# EAGLE board aprs_tracker_v5 (EAGLE 9.6.2)
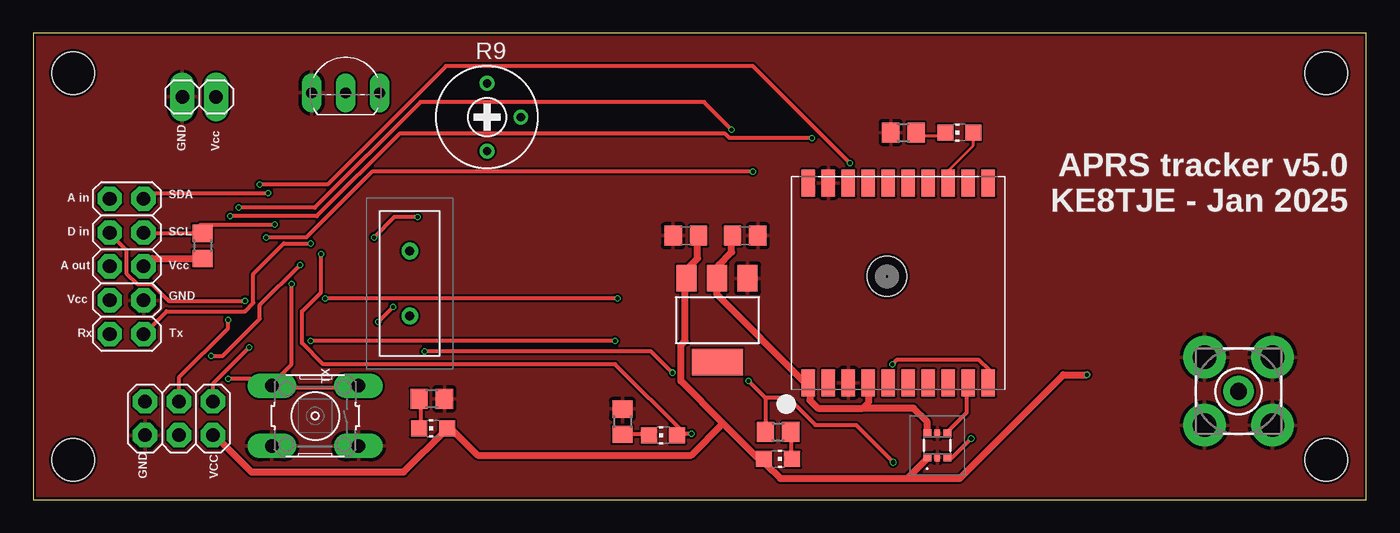
[diagram p0: board, top side]
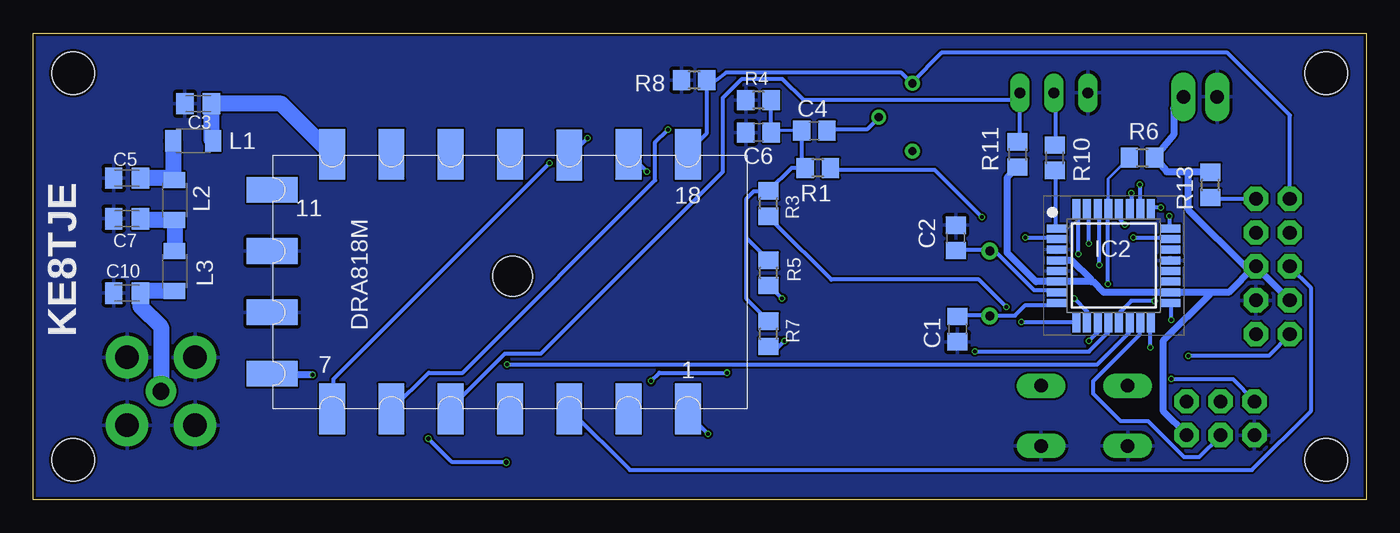
[diagram p1: board, bottom side, seen from below]

Size 100 x 35 mm. Coordinates in mm from the lower left corner, seen from the top.
Outline: 0,0 100,0 100,35 0,35 0,0
Copper layers (1*16): Top 0.035mm / dielectric 1.6mm / Bottom 0.035mm
Design rules "jlcpcb-2layers": minimum track width 5mil, minimum drill 0.3mm, track to track 5mil, track to pad 5mil, pad to pad 5mil, via to via 5mil, smd to smd 5mil, copper to edge 0.2mm, drill to drill 6mil, minimum pad ring 10mil, minimum via ring 3mil, stop-mask expansion 4mil, vias tented up to drill 0mil, thermal gap 10mil
Net classes: 0 default: width 0.229 mm, clearance 0.152 mm; 1 PWR: width 0.508 mm, clearance 0.152 mm; 2 V_bat: width 0.305 mm, clearance 0.152 mm; 3 50 ohm: width 1.21 mm, clearance 0.26 mm
Holes 3.2 mm at 3,32 3,3 97,32 97,3

## Footprints (pad centres in the part's own frame; a part is rotated, then mirrored left to right if it is on the bottom)
C0805 = smd 1.3 x 1.5: 1 -0.95,0; 2 0.95,0
C0805K = smd 1.3 x 1.6: 1 -1,0; 2 1,0
CHIP-LED0805 = smd 1.2 x 1.2: A 0,-1.05; C 0,1.05
QFP80P900X900X120-32N = smd 1.5 x 0.6: 1 -4.25,2.8; 2 -4.25,2; 3 -4.25,1.2; 4 -4.25,0.4; 5 -4.25,-0.4; 6 -4.25,-1.2; 7 -4.25,-2; 8 -4.25,-2.8; 17 4.25,-2.8; 18 4.25,-2; 19 4.25,-1.2; 20 4.25,-0.4; 21 4.25,0.4; 22 4.25,1.2; 23 4.25,2; 24 4.25,2.8 | smd 0.6 x 1.5: 9 -2.8,-4.25; 10 -2,-4.25; 11 -1.2,-4.25; 12 -0.4,-4.25; 13 0.4,-4.25; 14 1.2,-4.25; 15 2,-4.25; 16 2.8,-4.25; 25 2.8,4.25; 26 2,4.25; 27 1.2,4.25; 28 0.4,4.25; 29 -0.4,4.25; 30 -1.2,4.25; 31 -2,4.25; 32 -2.8,4.25
74LVCH1T45GW125 = smd 0.6 x 0.6: 1 -0.9,0.75; 3 -0.9,-0.75; 4 0.9,-0.75; 6 0.9,0.75 | smd 0.6 x 0.4: 2 -0.9,0; 5 0.9,0
SOT223 = smd 1.499 x 2.007: 1 -2.261,-3.15; 2 0.025,-3.15; 3 2.311,-3.15 | smd 3.81 x 2.007: 4 0,3.15
2X03 = drill 1.016 octagon: 1 -2.54,-1.27; 2 -2.54,1.27; 3 0,-1.27; 4 0,1.27; 5 2.54,-1.27; 6 2.54,1.27
2X05 = drill 1.016 octagon: 1 -5.08,-1.27; 2 -5.08,1.27; 3 -2.54,-1.27; 4 -2.54,1.27; 5 0,-1.27; 6 0,1.27; 7 2.54,-1.27; 8 2.54,1.27; 9 5.08,-1.27; 10 5.08,1.27
L3216C = smd 1.2 x 1.6: 1 -1.5,0; 2 1.5,0
1X02 = drill 1.016 long: 1 -1.27,0; 2 1.27,0
R0805 = smd 1.3 x 1.5: 1 -0.95,0; 2 0.95,0
RTRIM3339P = drill 0.61: 1 -2.54,0; 2 0,-2.54; 3 2.54,0
B3F-10XX = drill 1.016 long: 1 -3.251,2.261; 2 3.251,2.261; 3 -3.251,-2.261; 4 3.251,-2.261
TO92-EBC-OVAL = drill 0.813 long: B 0,-1.27; C 2.54,-1.27; E -2.54,-1.27
FGPMMOPA6H = smd 2 x 1: P$1 -7.5,6.75; P$2 -7.5,5.25; P$3 -7.5,3.75; P$4 -7.5,2.25; P$5 -7.5,0.75; P$6 -7.5,-0.75; P$7 -7.5,-2.25; P$8 -7.5,-3.75; P$9 -7.5,-5.25; P$10 -7.5,-6.75; P$11 7.5,-6.75; P$12 7.5,-5.25; P$13 7.5,-3.75; P$14 7.5,-2.25; P$15 7.5,-0.75; P$16 7.5,0.75; P$17 7.5,2.25; P$18 7.5,3.75; P$19 7.5,5.25; P$20 7.5,6.75 | hole 3: 0.5,0.85
DRA818A = smd 3.81 x 1.93: 1 -9.45,-13.25; 2 -9.45,-8.8; 3 -9.45,-4.35; 4 -9.45,0.1; 5 -9.45,4.55; 6 -9.45,9; 7 -9.45,13.45; 12 9.65,13.45; 13 9.65,9; 14 9.65,4.55; 15 9.65,0.1; 16 9.6,-4.35; 17 9.65,-8.8; 18 9.65,-13.25 | smd 1.93 x 3.81: 8 -6.8,17.95; 9 -2.2,17.95; 10 2.4,17.95; 11 7,17.95
BU-SMA-V = drill 1.27: 1 0,0 | drill 1.778: 2 -2.55,2.55; 3 2.55,2.55; 4 2.55,-2.55; 5 -2.55,-2.55
ATS080BE = drill 0.68 pad 1.247: 1 0,0; 2 4.88,0

## Placement (x,y rotation side)
C1  [C0805]  30.66,12.79 270 bottom
C2  [C0805]  30.8,19.64 90 bottom
C3  20p  [C0805K]  87.63,29.72 180 bottom
C4  4.7u  [C0805]  41.4,27.69 180 bottom
C5  36p  [C0805K]  92.96,24.13 180 bottom
C6  100n  [C0805]  45.59,27.56 180 bottom
C7  36p  [C0805K]  92.96,21.08 180 bottom
C8  10u  [C0805]  48.96,19.81 180 top
C9  10u  [C0805]  53.41,19.81 0 top
C10  20p  [C0805K]  92.96,15.49 180 bottom
D2  [CHIP-LED0805]  55.88,3.05 270 top
D3  [CHIP-LED0805]  69.47,27.56 90 top
D4  [CHIP-LED0805]  47.24,4.83 90 top
D5  [CHIP-LED0805]  29.99,5.33 90 top
IC2  ATMEGA328PB-AUR  [QFP80P900X900X120-32N]  18.94,17.56 0 bottom
IC3  74LVCH1T45GW,125  [74LVCH1T45GW125]  67.82,4.06 90 top
IC4  REG1117  [SOT223]  51.32,13.46 180 top
JP1  [2X03]  10.92,6.1 0 top
JP3  [2X05]  7,17.5 270 top
L1  56n  [L3216C]  88.01,26.92 180 bottom
L2  68n  [L3216C]  89.41,22.48 270 bottom
L3  56n  [L3216C]  89.41,17.14 270 bottom
PWR_IN  PINHD-1X2  [1X02]  12.45,30.23 0 top
R1  8.2k  [R0805]  41.15,24.89 180 bottom
R2  330  [R0805]  29.89,7.57 180 top
R3  3.9k  [R0805]  44.83,22.23 90 bottom
R4  270  [R0805]  45.59,29.97 180 bottom
R5  2.2k  [R0805]  44.83,17.02 90 bottom
R6  10k  [R0805]  16.82,25.66 0 bottom
R7  1k  [R0805]  44.83,12.45 90 bottom
R8  1k  [R0805]  50.42,31.5 180 bottom
R9  1k  [RTRIM3339P]  34.04,28.7 90 top
R10  1k  [R0805]  23.37,25.65 90 bottom
R11  1k  [R0805]  26.16,25.91 270 bottom
R12  330  [R0805]  65.28,27.56 0 top
R13  10k  [R0805]  11.68,23.62 90 bottom
R14  330  [R0805]  44.2,5.84 270 top
R16  10k  [R0805]  12.7,19.05 270 top
R17  1k  [R0805]  55.88,5.08 0 top
S2  [B3F-10XX]  21.15,6.27 180 top
T1  2N2222  [TO92-EBC-OVAL]  23.43,31.8 0 top
U1  [FGPMMOPA6H]  64.9,16.26 90 top
U$1  [DRA818A]  64.14,16.26 90 bottom
X1  BU-SMA-V  [BU-SMA-V]  90.42,8.13 0 top
Y1  ATS080B-E  [ATS080BE]  28.24,13.78 90 top

## Library data of the parts
C1-C10 = rcl; SPICEPREFIX: C
D2-D5 = led
IC2 = ATMEGA328PB-AUR; DESCRIPTION: 8-bit Microcontrollers - MCU ATMEGA328PB IND TEMP T&R; HEIGHT: 1.2mm; MANUFACTURER_NAME: Microchip; MANUFACTURER_PART_NUMBER: ATMEGA328PB-AUR; MOUSER_PART_NUMBER: 556-ATMEGA328PB-AUR; MOUSER_PRICE-STOCK: https://www.mouser.co.uk/ProductDetail/Microchip-Technology/ATMEGA328PB-AUR?qs=jy4bLUHv09i4S8%252BfUeCffg%3D%3D
IC3 = 74LVCH1T45GW_125; DESCRIPTION: 74LVC1T45; 74LVCH1T45 - Dual supply translating transceiver; 3-state@en-us; HEIGHT: 1.1mm; MANUFACTURER_NAME: Nexperia; MANUFACTURER_PART_NUMBER: 74LVCH1T45GW,125; MOUSER_PART_NUMBER: 771-74LVCH1T45GW125; MOUSER_PRICE-STOCK: https://www.mouser.co.uk/ProductDetail/Nexperia/74LVCH1T45GW125?qs=jquClx72t9DcZPG2mG4TEQ%3D%3D
IC4 = burr-brown; MPN: REG1117; OC_FARNELL: 1097566; OC_NEWARK: 14P6981
JP1 JP3 = pinhead
L1-L3 = rcl; SPICEPREFIX: L
PWR_IN = Connector; CATEGORY: Headers; DESCRIPTION: Header, Straight, 2 Position; MANUFACTURER: Generic; MPN: Generic; OPERATING_TEMPERATURE: Generic; PART_STATUS: Active; PITCH: 0.100" (2.54mm); ROHS_COMPLIANCE: Generic; SERIES: Generic; SUB-CATEGORY: Headers, Male Pins; TYPE: Board to Board or Cable, Unshrouded, Through Hole, Straight
R1-R8 R10-R14 R16 R17 = rcl; SPICEPREFIX: R
R9 = rcl; SPICEMODEL: X; SPICEPREFIXL: POT
S2 = switch-omron; MPN: B3F-1000; OC_FARNELL: 176432; OC_NEWARK: 36M3542
T1 U1 = adafruit
U$1 = dorji
X1 = con-coax; OC_FARNELL: unknown; OC_NEWARK: unknown
Y1 = ATS080B-E; DESCRIPTION: Crystals 8MHz 18pF Fund. -40C +85C; HEIGHT: 3.68mm; MANUFACTURER_NAME: CTS; MANUFACTURER_PART_NUMBER: ATS080B-E; MOUSER_PART_NUMBER: 774-ATS080B-E; MOUSER_PRICE-STOCK: https://www.mouser.co.uk/ProductDetail/CTS-Electronic-Components/ATS080B-E?qs=EyvxYzk7Sd1vYvYpN4HpEw%3D%3D

## Nets
+3V3 [PWR]: C9.1 IC3.6 IC4.2 U1.P$1 U1.P$4
A6: IC2.19
A7: IC2.22
GND [V_bat]: C1.2 C2.2 C3.2 C5.2 C6.2 C7.2 C8.2 C9.2 C10.2 IC2.3 IC2.5 IC2.21 IC3.2 IC3.5 IC4.1 JP1.1 JP3.8 PWR_IN.1 R2.1 R4.2 R8.2 R12.1 R14.1 S2.1 S2.2 T1.E U1.P$3 U1.P$19 U$1.9 U$1.10 X1.2 X1.3 X1.4 X1.5
GPS_RX: IC2.12 IC3.3 R17.1
GPS_TX: IC2.14 U1.P$10
MC_APRS_OUT: JP3.1 R8.1 R9.3 U$1.18
MU_RX_1: IC2.23 U$1.17
MU_TX_1: IC2.24 U$1.16
N$1: IC3.4 U1.P$9
N$2 [50 ohm]: C5.1 L1.2 L2.1
N$4 [50 ohm]: C7.1 L2.2 L3.1
N$5: D5.C R2.2
N$6: C1.1 IC2.8 Y1.1
N$7: C2.1 IC2.7 Y1.2
N$8 [50 ohm]: C10.1 L3.2 X1.1
N$9: D2.C R17.2
N$10: C4.2 C6.1 R1.2 R3.2 R4.1 R5.2 R7.2
N$11: C4.1 R9.2
N$12: R11.1 T1.C U$1.5
N$14: R10.2 T1.B
N$20: D3.C R12.2
N$22: D4.C R14.2
N$23: D3.A U1.P$13
PIN4: IC2.2 R1.1
PIN5: IC2.9 R3.1
PIN6: IC2.10 R5.1
PIN7: IC2.11 R7.1
PIN9: IC2.13 JP3.3
PIN11: IC2.15 JP1.3
PIN12: IC2.16 JP1.6
RADIO_OUTPUT_POWER: IC2.26 U$1.7
RADIO_PTT: IC2.1 R10.1
RADIO_SQL: D4.A IC2.32 U$1.1
RADIO_WAKE: IC2.25 U$1.6
RESET: IC2.29 JP1.2 R6.1 S2.3 S2.4
RFOUT [50 ohm]: C3.1 L1.1 U$1.12
RX: IC2.30 JP3.9
SCK: IC2.17 JP1.4
SCL: IC2.28 JP3.4 R16.1
SDA: IC2.27 JP3.2 R13.1
TO_DTMF: JP3.5 U$1.3
TX: IC2.31 JP3.10
VCC [PWR]: C8.1 D2.A D5.A IC2.4 IC2.6 IC2.18 IC3.1 IC4.3 JP1.5 JP3.6 JP3.7 PWR_IN.2 R6.2 R11.2 R13.2 R16.2 U$1.8

## Tracks (layer width: path | path; a pad name or v marks a point on that pad's centre or on a via)
+3V3
  Top 0.508: C9.1 52.39,19.68 52.39,18.57 51.44,17.62 51.44,16.67 IC4.2 51.28,16.35 51.28,15.4 57.94,8.73 U1.P$1 58.26,8.73 58.26,7.46 58.86,6.86 62.23,6.86 | 62.71,8.73 U1.P$4 62.65,7.28 62.23,6.86 | 62.23,6.86 66.04,6.86 67.07,5.83 IC3.6
GND
  pour Bottom: -1.52,36.32 101.09,36.32 101.09,-1.78 -1.52,-1.78
  pour Top: -1.52,36.58 100.33,36.58 100.33,-2.29 -1.52,-2.29
GPS_RX  (via drill 0.3, 0.35)
  Top 0.305: 55.09,5.08 R17.1 54.93,7.62 | v29.37,11.11 46.35,11.11 v47.94,9.53 | v53.66,8.89 54.93,7.62 | 54.93,7.62 56.65,7.62 58.67,5.59 61.72,5.59 v64.52,2.79 | IC3.3 68.95,3.16 v70.36,4.57
  Bottom 0.305: v29.37,11.11 20.8,11.11 19.37,12.54 19.37,13.18 IC2.12 | v47.94,9.53 53.02,9.53 v53.66,8.89 | v64.52,2.79 68.58,2.79 v70.36,4.57
GPS_TX  (via drill 0.3)
  Top 0.305: v64.45,10.16 64.77,10.48 70.96,10.48 71.75,9.68 71.75,8.89 U1.P$10
  Bottom 0.305: v64.45,10.16 20.16,10.16 17.78,12.54 17.78,13.18 IC2.14
MC_APRS_OUT
  Bottom 0.305: U$1.18 50.96,26.04 49.47,27.52 R8.1 48.79,31.5 48.01,32.07 34.92,32.07 34.13,31.27 | 34.13,31.27 R9.3 | JP3.1 5.73,28.84 10.41,33.53 31.88,33.53 34.13,31.27
MU_RX_1  (via drill 0.3)
  Top 0.305: v17.46,19.68 20.48,19.68 25.4,24.61 v53.98,24.61
  Bottom 0.305: v17.46,19.68 14.76,19.68 IC2.23 | v53.98,24.61 55.24,25.88 U$1.17
MU_TX_1  (via drill 0.3)
  Top 0.305: v14.76,21.27 21.27,21.27 27.46,27.46 51.91,27.46 52.23,27.15 v58.42,27.15
  Bottom 0.305: v14.76,21.27 14.76,20.48 IC2.24 | v58.42,27.15 59.69,25.88 U$1.16
N$1
  Top 0.305: IC3.4 68.58,5.08 70.01,6.51 70.01,8.73 U1.P$9
N$2
  Bottom 1.21: L1.2 89.51,24.08 L2.1 89.56,24.13 C5.1
N$4
  Bottom 1.21: L3.1 L2.2 91.86,20.98 C7.1
N$5
  Top 0.305: D5.C 29.05,5.4 29.05,7.46 R2.2
N$6
  Bottom 0.305: IC2.8 23.34,14.61 25.56,14.61 26.35,13.81 28.1,13.81 Y1.1 28.26,13.81 30.64,13.81 C1.1
N$7
  Bottom 0.305: IC2.7 23.34,15.72 24.92,15.72 27.78,18.57 28.1,18.57 Y1.2 28.26,18.73 30.64,18.73 C2.1
N$8
  Bottom 1.21: L3.2 91.82,15.64 C10.1 91.96,14.49 90.42,12.95 X1.1
N$9
  Top 0.305: D2.C 56.83,3.17 R17.2
N$10
  Bottom 0.229: 44.93,23.08 44.86,23.15 | C4.2 44.52,27.69 C6.1
  Bottom 0.305: C6.1 R4.1 | C4.2 42.35,25.15 R1.2 43.12,24.89 44.86,23.15 | 44.86,23.15 44.93,23.08 | R7.2 46.48,15.05 46.48,19.62 | 46.48,19.62 46.48,22.61 45.94,23.15 44.93,23.15 | 44.93,23.15 44.86,23.15 | R5.2 46.48,19.62 | R3.2 44.93,23.18 44.93,23.15
N$11
  Bottom 0.305: C4.1 40.42,27.78 37.47,27.78 36.67,28.57 R9.2
N$12
  Bottom 0.305: 26.04,30 26.04,30.48 T1.C 26.04,30 | 26.04,30 26.04,26.99 R11.1 | 26.04,30 42.23,30 43.81,31.59 46.83,31.59 48.26,30.16 48.26,24.61 61.91,10.95 64.61,10.95 68.74,6.83 U$1.5
N$14
  Bottom 0.305: R10.2 23.34,26.67 23.34,30.48 T1.B
N$20
  Top 0.229: 66.36,27.3 68.17,27.3 D3.C
  Top 0.305: R12.2 66.23,27.43 66.36,27.3
N$22
  Top 0.305: D4.C 46.04,4.92 44.29,4.92 R14.2
N$23
  Top 0.229: D3.A 70.52,26.58 68.65,24.7 U1.P$13
PIN4  (via drill 0.3)
  Top 0.305: v28.83,21.21 27.08,21.21 v25.56,19.68
  Bottom 0.305: v25.56,19.68 23.34,19.68 IC2.2 | v28.83,21.21 32.38,24.77 40.16,24.77 R1.1
PIN5  (via drill 0.3)
  Top 0.305: v26.99,14.45 v25.88,13.34
  Bottom 0.305: v25.88,13.34 21.75,13.34 IC2.9 | v26.99,14.45 28.37,15.83 28.62,16.08 28.88,16.34 29.05,16.51 40.13,16.51 44.31,20.68 44.31,20.97 44.77,21.43 R3.1
PIN6  (via drill 0.3)
  Top 0.305: v43.81,15.08 v21.91,15.08
  Bottom 0.305: v21.91,15.08 20.95,14.13 20.95,13.34 IC2.10 | v43.81,15.08 44.77,16.03 R5.1
PIN7  (via drill 0.3)
  Top 0.305: v43.66,11.91 v20.8,11.91
  Bottom 0.305: v20.8,11.91 20.16,12.54 20.16,13.18 IC2.11 | v43.66,11.91 44.13,11.43 44.77,11.43 R7.1
PIN9  (via drill 0.3)
  Top 0.305: v15.88,14.92 10.16,14.92 8.89,16.19 7.78,16.19 6.99,16.99 6.99,18.73 5.71,20 JP3.3
  Bottom 0.305: v15.88,14.92 17.62,14.92 18.41,14.13 18.41,13.34 IC2.13
PIN11
  Bottom 0.305: IC2.15 16.99,13.18 16.99,12.38 20.48,8.89 20.48,7.94 18.41,5.87 16.35,5.87 13.65,3.17 12.54,3.17 10.95,4.76 JP1.3
PIN12  (via drill 0.3)
  Top 0.305: v16.19,11.43 13.49,8.73 13.49,7.46 JP1.6
  Bottom 0.305: v16.19,11.43 16.19,13.18 IC2.16
RADIO_OUTPUT_POWER  (via drill 0.3)
  Top 0.305: v16.99,23.65 22.07,23.65 30.96,32.54 53.98,32.54 v61.28,25.24
  Bottom 0.305: v16.99,23.65 16.99,21.91 IC2.26 | v61.28,25.24 77.47,9.05 77.47,6.83 U$1.7
RADIO_PTT
  Bottom 0.305: IC2.1 23.34,20.48 23.34,24.61 R10.1
RADIO_SQL  (via drill 0.3)
  Top 0.305: v49.37,4.92 48.9,4.92 | 48.9,4.92 48.42,4.92 D4.A | v21.59,18.41 21.59,15.56 20.16,14.13 20.16,11.75 21.75,10.16 43.66,10.16 48.9,4.92
  Bottom 0.305: v49.37,4.92 50.8,6.35 50.8,6.67 U$1.1 | v21.59,18.41 21.59,21.75 IC2.32
RADIO_WAKE  (via drill 0.3)
  Top 0.305: v15.4,21.91 21.11,21.91 29.05,29.84 50.32,29.84 v52.39,27.78
  Bottom 0.305: v15.4,21.91 16.03,21.91 IC2.25 | v52.39,27.78 53.34,26.83 53.34,23.97 67.79,9.53 70.33,9.53 73.03,6.83 U$1.6
RESET  (via drill 0.3)
  Top 0.305: v19.37,16.19 19.37,10.16 17.78,8.57 S2.4 | v14.61,9.05 18.1,9.05 S2.4 | S2.3 24.29,8.41 17.94,8.41 S2.4
  Bottom 0.229: R6.1 19.37,24.06 19.37,22.54
  Bottom 0.305: 19.37,22.54 19.37,21.91 IC2.29 19.37,21.75 v19.37,16.19 | v14.61,9.05 10,9.05 8.41,7.46 JP1.2
RFOUT
  Bottom 1.21: U$1.12 81.4,29.72 C3.1 86.63,27.04 L1.1
RX  (via drill 0.3)
  Top 0.305: v20,17.62 16.99,14.61 16.99,13.56 14.22,10.79 v13.34,10.79
  Bottom 0.305: v20,17.62 20,21.75 IC2.30 | v13.34,10.79 7.3,10.79 5.71,12.38 JP3.9
SCK  (via drill 0.3)
  Top 0.305: v14.61,13.49 14.61,12.86 10.95,9.21 10.95,7.46 JP1.4
  Bottom 0.305: v14.61,13.49 14.61,14.61 IC2.17
SCL  (via drill 0.3)
  Top 0.305: JP3.4 8.41,20 12.61,20 R16.1 12.13,20.23 12.54,20.64 v18.1,20.64
  Bottom 0.305: v18.1,20.64 18.41,20.95 18.41,21.75 IC2.28
SDA  (via drill 0.3)
  Top 0.305: v17.62,23.02 8.73,23.02 8.41,22.7 JP3.2
  Bottom 0.305: R13.1 11.59,22.54 8.41,22.54 JP3.2 | v17.62,23.02 17.62,21.91 IC2.27
TO_DTMF
  Bottom 0.305: JP3.5 5.71,17.46 4.13,15.88 4.13,6.67 8.57,2.22 55.24,2.22 59.69,6.67 U$1.3
TX  (via drill 0.3)
  Top 0.305: JP3.10 8.41,12.54 10,14.13 15.88,14.13 16.51,14.76 16.51,16.94 18.8,19.23 20.8,19.23 v20.8,19.21
  Bottom 0.305: v20.8,19.21 20.8,21.75 IC2.31
VCC  (via drill 0.3)
  Top 0.508: C8.1 49.85,19.68 49.85,18.1 49.05,17.3 49.05,16.67 IC4.3 48.9,16.51 48.9,11.91 48.58,11.59 48.58,8.89 51.75,5.71 | 65.56,1.59 66.99,3.02 IC3.1 | 65.56,1.59 56.04,1.59 54.93,2.7 54.93,3.02 D2.A 54.77,2.7 51.75,5.71 | v79.06,9.37 77.28,9.37 69.5,1.59 65.56,1.59 | JP1.5 13.49,4.92 16.35,2.06 27.78,2.06 30.96,5.24 D5.A 31.27,5.4 33.34,3.33 49.37,3.33 51.75,5.71 | R16.2 12.61,18.1 8.89,18.1 8.41,17.62 JP3.6
  Bottom 0.508: v79.06,9.37 82.07,9.37 U$1.8 | 13.34,24.61 14.97,24.61 R6.2 14.45,27.39 14.45,29.37 13.65,30.16 PWR_IN.2 | 13.34,24.61 11.75,24.61 R13.2 | 11.75,15.56 10.32,15.56 8.41,17.46 JP3.6 | 11.75,15.56 14.61,15.56 IC2.18 14.92,15.56 19.68,15.56 20.48,16.35 20.64,16.35 | 20.64,16.35 23.18,16.35 IC2.6 23.34,16.35 24.77,16.35 26.95,18.54 26.95,24.17 R11.2 | IC2.4 23.18,17.94 22.07,17.94 20.64,16.51 20.64,16.35 | JP3.7 5.87,15.08 8.1,17.3 JP3.6 | 13.34,24.61 13.34,21.75 8.89,17.3 JP3.6 | JP1.5 13.49,4.92 15.24,6.67 15.24,11.91 11.75,15.4 11.75,15.56

## Text on the board
tPlace: GND | Vcc | SDA | A in | D in | SCL | A out | Vcc | Vcc | GND | Rx | Tx
tNames: APRS tracker v5.0 / KE8TJE - Jan 2025 | TX | GND | VCC
bNames: KE8TJE